# EAGLE board Bunza-DCC-Front-End-array (EAGLE 7.7.0)
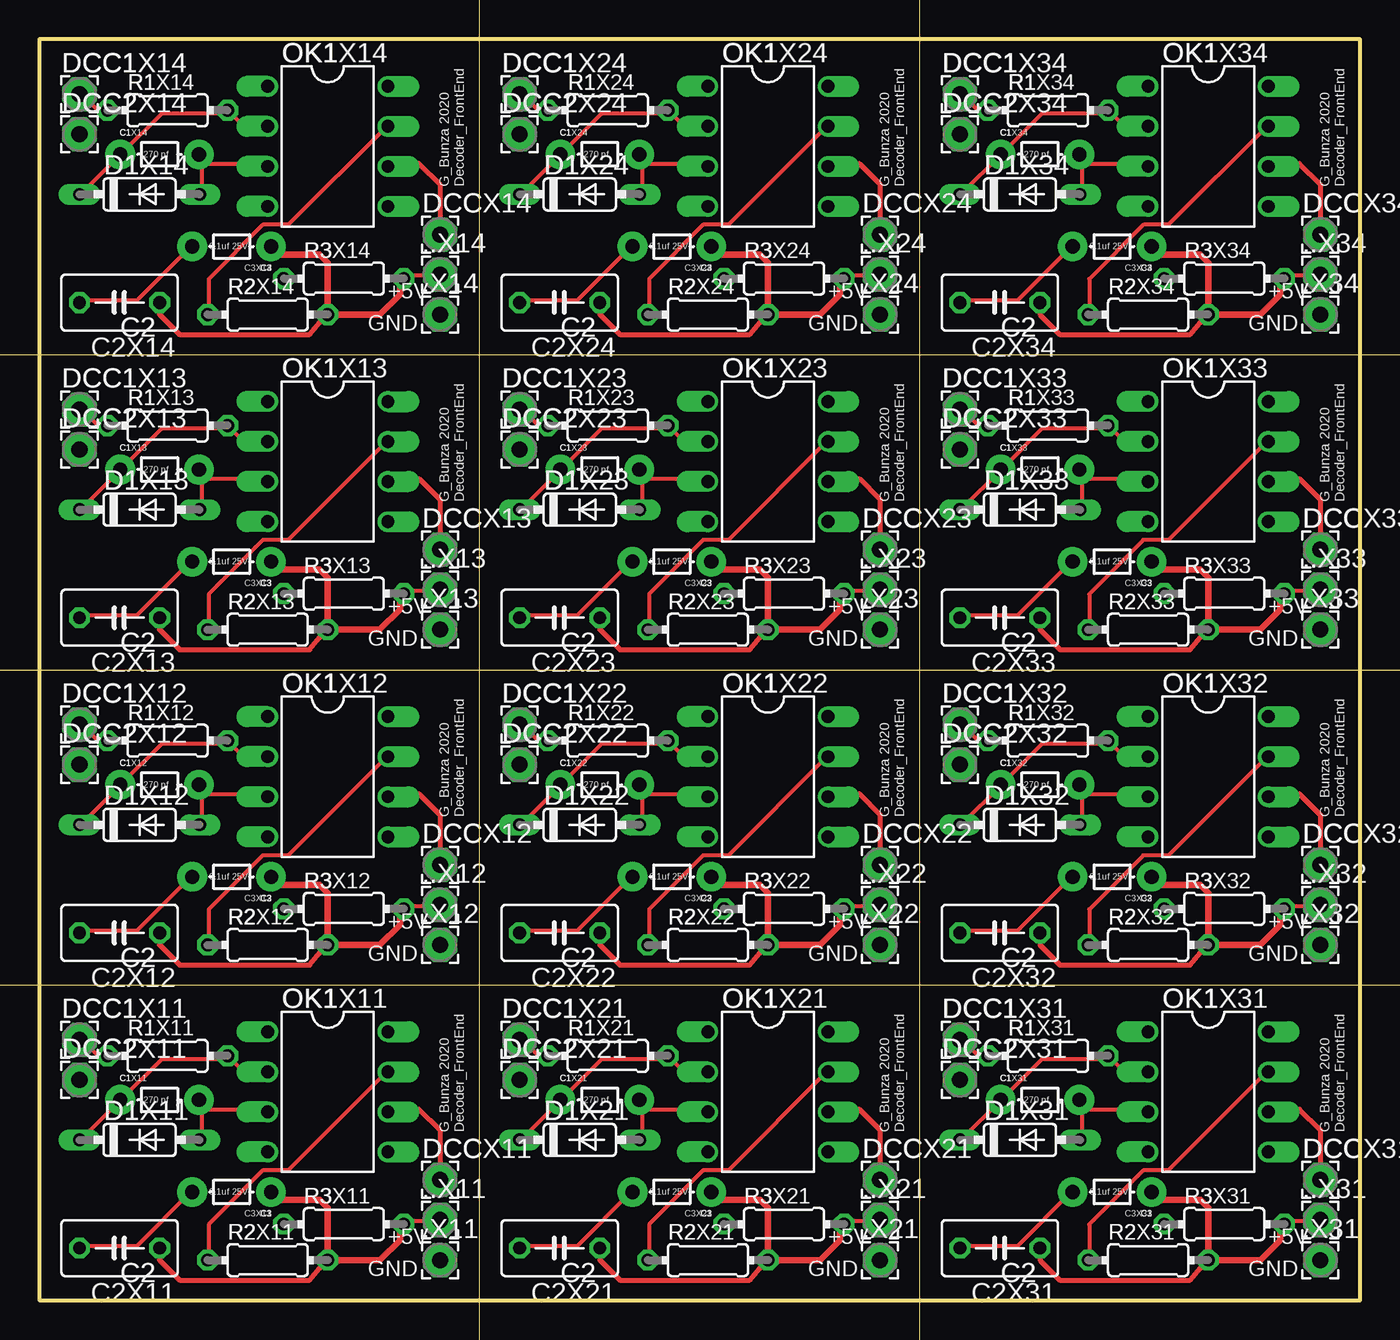
[diagram p0: board, top side]
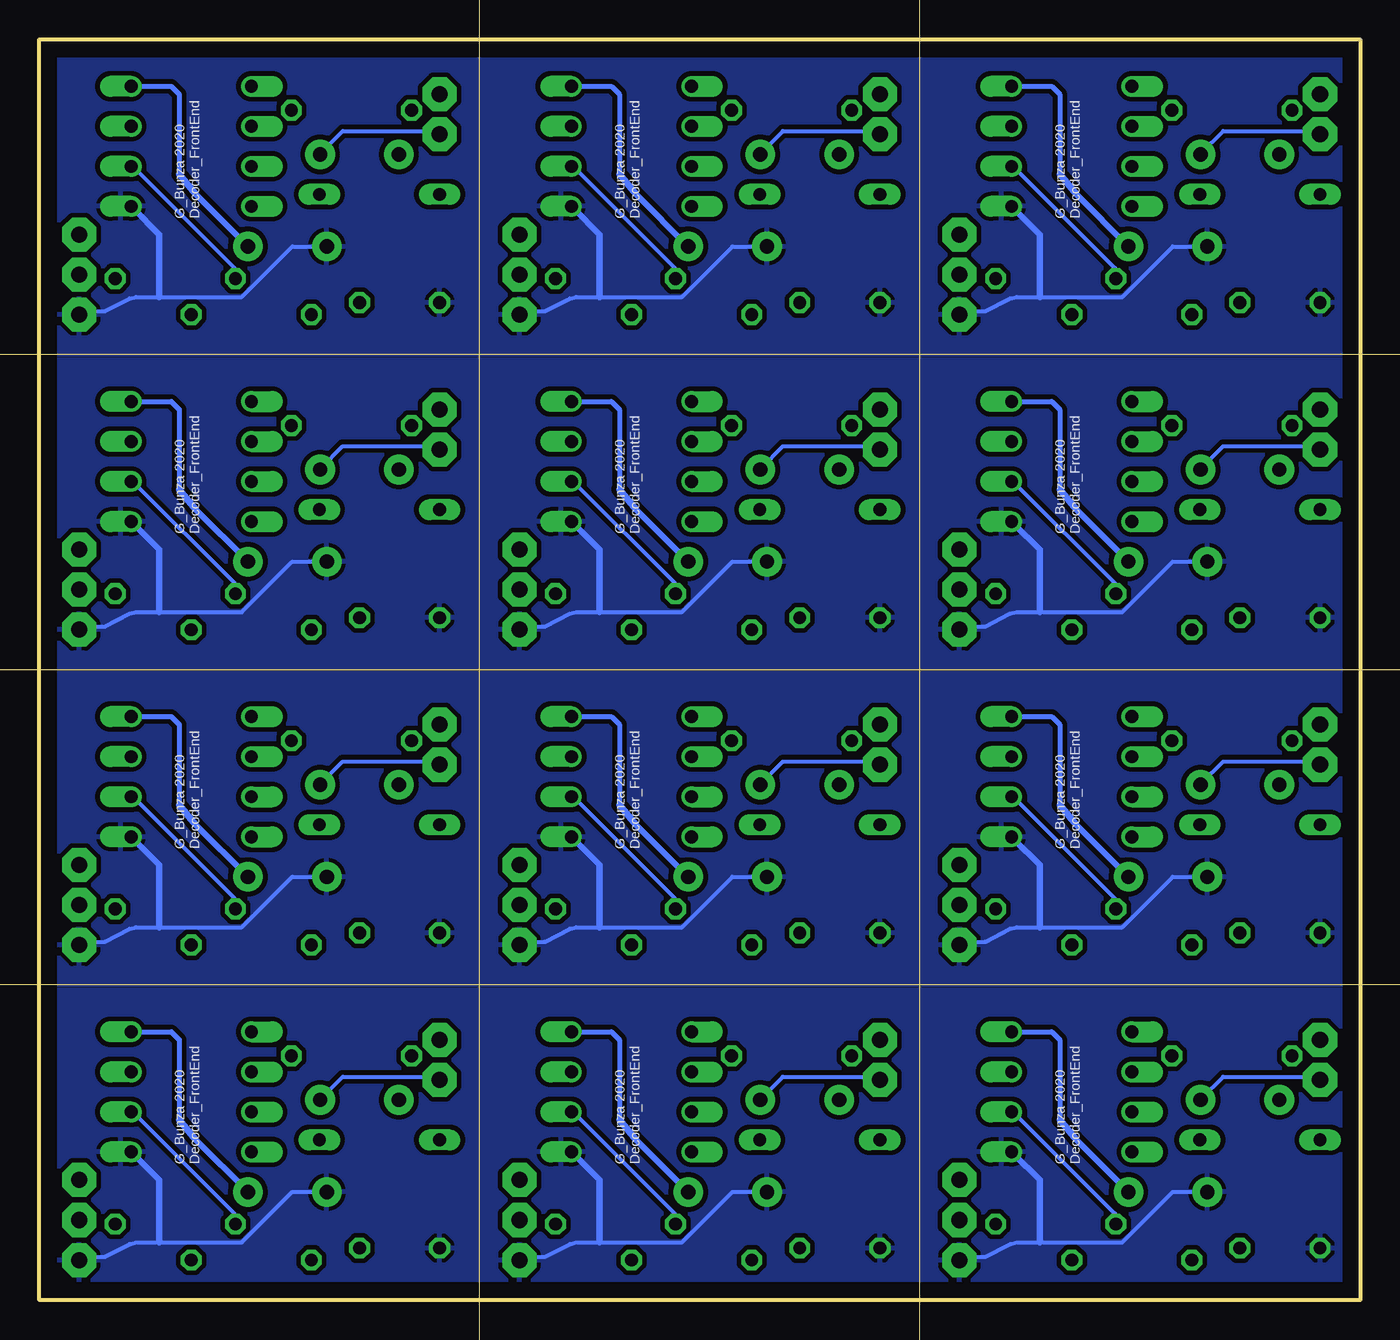
[diagram p1: board, bottom side, seen from below]

Size 83.76 x 79.96 mm. Coordinates in mm from the lower left corner, seen from the top.
Outline: 0,0 83.76,0 83.76,79.96 0,79.96 0,0
Copper layers (1*16): Top 0.035mm / dielectric 1.5mm / Bottom 0.035mm
Design rules "default": minimum track width 10mil, minimum drill 24mil, track to track 8mil, track to pad 8mil, pad to pad 8mil, via to via 8mil, smd to smd 8mil, copper to edge 40mil, drill to drill 8mil, minimum pad ring 10mil, minimum via ring 8mil, stop-mask expansion 4mil, vias tented up to drill 0mil, thermal gap 10mil
Milling: 5 lines

## Footprints (pad centres in the part's own frame; a part is rotated, then mirrored left to right if it is on the bottom)
2,15/1,0 = drill 1.016 pad 2.159 octagon: 1 0,0
AXIAL-5MM = drill 0.9 pad 1.88: P$1 -2.5,0; P$2 2.5,0
C050-035X075 = drill 0.813 octagon: 1 -2.54,0; 2 2.54,0
DO35-7 = drill 0.813 long: A 3.81,0; C -3.81,0
DIL08 = drill 0.813 offset: 1 -3.81,-3.81; 2 -1.27,-3.81; 3 1.27,-3.81; 4 3.81,-3.81; 5 3.81,3.81; 6 1.27,3.81; 7 -1.27,3.81; 8 -3.81,3.81
0204/7 = drill 0.813 octagon: 1 -3.81,0; 2 3.81,0

## Placement (x,y rotation side)
..X11  [2,15/1,0]  25.4,5.08 0 top
..X12  [2,15/1,0]  25.4,25.07 0 top
..X13  [2,15/1,0]  25.4,45.06 0 top
..X14  [2,15/1,0]  25.4,65.05 0 top
..X21  [2,15/1,0]  53.32,5.08 0 top
..X22  [2,15/1,0]  53.32,25.07 0 top
..X23  [2,15/1,0]  53.32,45.06 0 top
..X24  [2,15/1,0]  53.32,65.05 0 top
..X31  [2,15/1,0]  81.24,5.08 0 top
..X32  [2,15/1,0]  81.24,25.07 0 top
..X33  [2,15/1,0]  81.24,45.06 0 top
..X34  [2,15/1,0]  81.24,65.05 0 top
.X11  [2,15/1,0]  25.4,2.54 0 top
.X12  [2,15/1,0]  25.4,22.53 0 top
.X13  [2,15/1,0]  25.4,42.52 0 top
.X14  [2,15/1,0]  25.4,62.51 0 top
.X21  [2,15/1,0]  53.32,2.54 0 top
.X22  [2,15/1,0]  53.32,22.53 0 top
.X23  [2,15/1,0]  53.32,42.52 0 top
.X24  [2,15/1,0]  53.32,62.51 0 top
.X31  [2,15/1,0]  81.24,2.54 0 top
.X32  [2,15/1,0]  81.24,22.53 0 top
.X33  [2,15/1,0]  81.24,42.52 0 top
.X34  [2,15/1,0]  81.24,62.51 0 top
C1X11  270 pf  [AXIAL-5MM]  7.62,12.7 0 top
C1X12  270 pf  [AXIAL-5MM]  7.62,32.69 0 top
C1X13  270 pf  [AXIAL-5MM]  7.62,52.68 0 top
C1X14  270 pf  [AXIAL-5MM]  7.62,72.67 0 top
C1X21  270 pf  [AXIAL-5MM]  35.54,12.7 0 top
C1X22  270 pf  [AXIAL-5MM]  35.54,32.69 0 top
C1X23  270 pf  [AXIAL-5MM]  35.54,52.68 0 top
C1X24  270 pf  [AXIAL-5MM]  35.54,72.67 0 top
C1X31  270 pf  [AXIAL-5MM]  63.46,12.7 0 top
C1X32  270 pf  [AXIAL-5MM]  63.46,32.69 0 top
C1X33  270 pf  [AXIAL-5MM]  63.46,52.68 0 top
C1X34  270 pf  [AXIAL-5MM]  63.46,72.67 0 top
C2X11  22uf 25V  [C050-035X075]  5.08,3.3 180 top
C2X12  22uf 25V  [C050-035X075]  5.08,23.29 180 top
C2X13  22uf 25V  [C050-035X075]  5.08,43.28 180 top
C2X14  22uf 25V  [C050-035X075]  5.08,63.27 180 top
C2X21  22uf 25V  [C050-035X075]  33,3.3 180 top
C2X22  22uf 25V  [C050-035X075]  33,23.29 180 top
C2X23  22uf 25V  [C050-035X075]  33,43.28 180 top
C2X24  22uf 25V  [C050-035X075]  33,63.27 180 top
C2X31  22uf 25V  [C050-035X075]  60.92,3.3 180 top
C2X32  22uf 25V  [C050-035X075]  60.92,23.29 180 top
C2X33  22uf 25V  [C050-035X075]  60.92,43.28 180 top
C2X34  22uf 25V  [C050-035X075]  60.92,63.27 180 top
C3X11  0.1uf 25V  [AXIAL-5MM]  12.19,6.86 180 top
C3X12  0.1uf 25V  [AXIAL-5MM]  12.19,26.85 180 top
C3X13  0.1uf 25V  [AXIAL-5MM]  12.19,46.84 180 top
C3X14  0.1uf 25V  [AXIAL-5MM]  12.19,66.83 180 top
C3X21  0.1uf 25V  [AXIAL-5MM]  40.11,6.86 180 top
C3X22  0.1uf 25V  [AXIAL-5MM]  40.11,26.85 180 top
C3X23  0.1uf 25V  [AXIAL-5MM]  40.11,46.84 180 top
C3X24  0.1uf 25V  [AXIAL-5MM]  40.11,66.83 180 top
C3X31  0.1uf 25V  [AXIAL-5MM]  68.03,6.86 180 top
C3X32  0.1uf 25V  [AXIAL-5MM]  68.03,26.85 180 top
C3X33  0.1uf 25V  [AXIAL-5MM]  68.03,46.84 180 top
C3X34  0.1uf 25V  [AXIAL-5MM]  68.03,66.83 180 top
D1X11  1N4148  [DO35-7]  6.35,10.16 0 top
D1X12  1N4148  [DO35-7]  6.35,30.15 0 top
D1X13  1N4148  [DO35-7]  6.35,50.14 0 top
D1X14  1N4148  [DO35-7]  6.35,70.13 0 top
D1X21  1N4148  [DO35-7]  34.27,10.16 0 top
D1X22  1N4148  [DO35-7]  34.27,30.15 0 top
D1X23  1N4148  [DO35-7]  34.27,50.14 0 top
D1X24  1N4148  [DO35-7]  34.27,70.13 0 top
D1X31  1N4148  [DO35-7]  62.19,10.16 0 top
D1X32  1N4148  [DO35-7]  62.19,30.15 0 top
D1X33  1N4148  [DO35-7]  62.19,50.14 0 top
D1X34  1N4148  [DO35-7]  62.19,70.13 0 top
DCC1X11  [2,15/1,0]  2.54,16.51 0 top
DCC1X12  [2,15/1,0]  2.54,36.5 0 top
DCC1X13  [2,15/1,0]  2.54,56.49 0 top
DCC1X14  [2,15/1,0]  2.54,76.48 0 top
DCC1X21  [2,15/1,0]  30.46,16.51 0 top
DCC1X22  [2,15/1,0]  30.46,36.5 0 top
DCC1X23  [2,15/1,0]  30.46,56.49 0 top
DCC1X24  [2,15/1,0]  30.46,76.48 0 top
DCC1X31  [2,15/1,0]  58.38,16.51 0 top
DCC1X32  [2,15/1,0]  58.38,36.5 0 top
DCC1X33  [2,15/1,0]  58.38,56.49 0 top
DCC1X34  [2,15/1,0]  58.38,76.48 0 top
DCC2X11  [2,15/1,0]  2.54,13.97 0 top
DCC2X12  [2,15/1,0]  2.54,33.96 0 top
DCC2X13  [2,15/1,0]  2.54,53.95 0 top
DCC2X14  [2,15/1,0]  2.54,73.94 0 top
DCC2X21  [2,15/1,0]  30.46,13.97 0 top
DCC2X22  [2,15/1,0]  30.46,33.96 0 top
DCC2X23  [2,15/1,0]  30.46,53.95 0 top
DCC2X24  [2,15/1,0]  30.46,73.94 0 top
DCC2X31  [2,15/1,0]  58.38,13.97 0 top
DCC2X32  [2,15/1,0]  58.38,33.96 0 top
DCC2X33  [2,15/1,0]  58.38,53.95 0 top
DCC2X34  [2,15/1,0]  58.38,73.94 0 top
DCCX11  [2,15/1,0]  25.4,7.62 0 top
DCCX12  [2,15/1,0]  25.4,27.61 0 top
DCCX13  [2,15/1,0]  25.4,47.6 0 top
DCCX14  [2,15/1,0]  25.4,67.59 0 top
DCCX21  [2,15/1,0]  53.32,7.62 0 top
DCCX22  [2,15/1,0]  53.32,27.61 0 top
DCCX23  [2,15/1,0]  53.32,47.6 0 top
DCCX24  [2,15/1,0]  53.32,67.59 0 top
DCCX31  [2,15/1,0]  81.24,7.62 0 top
DCCX32  [2,15/1,0]  81.24,27.61 0 top
DCCX33  [2,15/1,0]  81.24,47.6 0 top
DCCX34  [2,15/1,0]  81.24,67.59 0 top
OK1X11  6N137  [DIL08]  18.29,13.21 270 top
OK1X12  6N137  [DIL08]  18.29,33.2 270 top
OK1X13  6N137  [DIL08]  18.29,53.19 270 top
OK1X14  6N137  [DIL08]  18.29,73.18 270 top
OK1X21  6N137  [DIL08]  46.21,13.21 270 top
OK1X22  6N137  [DIL08]  46.21,33.2 270 top
OK1X23  6N137  [DIL08]  46.21,53.19 270 top
OK1X24  6N137  [DIL08]  46.21,73.18 270 top
OK1X31  6N137  [DIL08]  74.13,13.21 270 top
OK1X32  6N137  [DIL08]  74.13,33.2 270 top
OK1X33  6N137  [DIL08]  74.13,53.19 270 top
OK1X34  6N137  [DIL08]  74.13,73.18 270 top
R1X11  1.3K  [0204/7]  8.13,15.49 0 top
R1X12  1.3K  [0204/7]  8.13,35.48 0 top
R1X13  1.3K  [0204/7]  8.13,55.47 0 top
R1X14  1.3K  [0204/7]  8.13,75.46 0 top
R1X21  1.3K  [0204/7]  36.05,15.49 0 top
R1X22  1.3K  [0204/7]  36.05,35.48 0 top
R1X23  1.3K  [0204/7]  36.05,55.47 0 top
R1X24  1.3K  [0204/7]  36.05,75.46 0 top
R1X31  1.3K  [0204/7]  63.97,15.49 0 top
R1X32  1.3K  [0204/7]  63.97,35.48 0 top
R1X33  1.3K  [0204/7]  63.97,55.47 0 top
R1X34  1.3K  [0204/7]  63.97,75.46 0 top
R2X11  10K  [0204/7]  14.48,2.54 0 top
R2X12  10K  [0204/7]  14.48,22.53 0 top
R2X13  10K  [0204/7]  14.48,42.52 0 top
R2X14  10K  [0204/7]  14.48,62.51 0 top
R2X21  10K  [0204/7]  42.4,2.54 0 top
R2X22  10K  [0204/7]  42.4,22.53 0 top
R2X23  10K  [0204/7]  42.4,42.52 0 top
R2X24  10K  [0204/7]  42.4,62.51 0 top
R2X31  10K  [0204/7]  70.32,2.54 0 top
R2X32  10K  [0204/7]  70.32,22.53 0 top
R2X33  10K  [0204/7]  70.32,42.52 0 top
R2X34  10K  [0204/7]  70.32,62.51 0 top
R3X11  5K  [0204/7]  19.3,4.83 0 top
R3X12  5K  [0204/7]  19.3,24.82 0 top
R3X13  5K  [0204/7]  19.3,44.81 0 top
R3X14  5K  [0204/7]  19.3,64.8 0 top
R3X21  5K  [0204/7]  47.22,4.83 0 top
R3X22  5K  [0204/7]  47.22,24.82 0 top
R3X23  5K  [0204/7]  47.22,44.81 0 top
R3X24  5K  [0204/7]  47.22,64.8 0 top
R3X31  5K  [0204/7]  75.14,4.83 0 top
R3X32  5K  [0204/7]  75.14,24.82 0 top
R3X33  5K  [0204/7]  75.14,44.81 0 top
R3X34  5K  [0204/7]  75.14,64.8 0 top

## Library data of the parts
..X11-..X14 ..X21-..X24 ..X31-..X34 .X11-.X14 .X21-.X24 .X31-.X34 DCC1X11-DCC1X14 DCC1X21-DCC1X24 DCC1X31-DCC1X34 DCC2X11-DCC2X14 DCC2X21-DCC2X24 DCC2X31-DCC2X34 DCCX11-DCCX14 DCCX21-DCCX24 DCCX31-DCCX34 = wirepad
C1X11-C1X14 C1X21-C1X24 C1X31-C1X34 C3X11-C3X14 C3X21-C3X24 C3X31-C3X34 = SparkFun-Capacitors
C2X11-C2X14 C2X21-C2X24 C2X31-C2X34 R1X11-R1X14 R1X21-R1X24 R1X31-R1X34 R2X11-R2X14 R2X21-R2X24 R2X31-R2X34 R3X11-R3X14 R3X21-R3X24 R3X31-R3X34 = rcl
D1X11-D1X14 D1X21-D1X24 D1X31-D1X34 = diode
OK1X11-OK1X14 OK1X21-OK1X24 OK1X31-OK1X34 = optocoupler

## Nets
GNDX11: .X11.1 C2X11.2 C3X11.P$2 OK1X11.5
GNDX12: .X12.1 C2X12.2 C3X12.P$2 OK1X12.5
GNDX13: .X13.1 C2X13.2 C3X13.P$2 OK1X13.5
GNDX14: .X14.1 C2X14.2 C3X14.P$2 OK1X14.5
GNDX21: .X21.1 C2X21.2 C3X21.P$2 OK1X21.5
GNDX22: .X22.1 C2X22.2 C3X22.P$2 OK1X22.5
GNDX23: .X23.1 C2X23.2 C3X23.P$2 OK1X23.5
GNDX24: .X24.1 C2X24.2 C3X24.P$2 OK1X24.5
GNDX31: .X31.1 C2X31.2 C3X31.P$2 OK1X31.5
GNDX32: .X32.1 C2X32.2 C3X32.P$2 OK1X32.5
GNDX33: .X33.1 C2X33.2 C3X33.P$2 OK1X33.5
GNDX34: .X34.1 C2X34.2 C3X34.P$2 OK1X34.5
N$1X11: DCC1X11.1 R1X11.1
N$1X12: DCC1X12.1 R1X12.1
N$1X13: DCC1X13.1 R1X13.1
N$1X14: DCC1X14.1 R1X14.1
N$1X21: DCC1X21.1 R1X21.1
N$1X22: DCC1X22.1 R1X22.1
N$1X23: DCC1X23.1 R1X23.1
N$1X24: DCC1X24.1 R1X24.1
N$1X31: DCC1X31.1 R1X31.1
N$1X32: DCC1X32.1 R1X32.1
N$1X33: DCC1X33.1 R1X33.1
N$1X34: DCC1X34.1 R1X34.1
N$2X11: DCCX11.1 OK1X11.6 R3X11.1
N$2X12: DCCX12.1 OK1X12.6 R3X12.1
N$2X13: DCCX13.1 OK1X13.6 R3X13.1
N$2X14: DCCX14.1 OK1X14.6 R3X14.1
N$2X21: DCCX21.1 OK1X21.6 R3X21.1
N$2X22: DCCX22.1 OK1X22.6 R3X22.1
N$2X23: DCCX23.1 OK1X23.6 R3X23.1
N$2X24: DCCX24.1 OK1X24.6 R3X24.1
N$2X31: DCCX31.1 OK1X31.6 R3X31.1
N$2X32: DCCX32.1 OK1X32.6 R3X32.1
N$2X33: DCCX33.1 OK1X33.6 R3X33.1
N$2X34: DCCX34.1 OK1X34.6 R3X34.1
N$13X11: OK1X11.7 R2X11.1
N$13X12: OK1X12.7 R2X12.1
N$13X13: OK1X13.7 R2X13.1
N$13X14: OK1X14.7 R2X14.1
N$13X21: OK1X21.7 R2X21.1
N$13X22: OK1X22.7 R2X22.1
N$13X23: OK1X23.7 R2X23.1
N$13X24: OK1X24.7 R2X24.1
N$13X31: OK1X31.7 R2X31.1
N$13X32: OK1X32.7 R2X32.1
N$13X33: OK1X33.7 R2X33.1
N$13X34: OK1X34.7 R2X34.1
N$33X11: ..X11.1 C2X11.1 C3X11.P$1 OK1X11.8 R2X11.2 R3X11.2
N$33X12: ..X12.1 C2X12.1 C3X12.P$1 OK1X12.8 R2X12.2 R3X12.2
N$33X13: ..X13.1 C2X13.1 C3X13.P$1 OK1X13.8 R2X13.2 R3X13.2
N$33X14: ..X14.1 C2X14.1 C3X14.P$1 OK1X14.8 R2X14.2 R3X14.2
N$33X21: ..X21.1 C2X21.1 C3X21.P$1 OK1X21.8 R2X21.2 R3X21.2
N$33X22: ..X22.1 C2X22.1 C3X22.P$1 OK1X22.8 R2X22.2 R3X22.2
N$33X23: ..X23.1 C2X23.1 C3X23.P$1 OK1X23.8 R2X23.2 R3X23.2
N$33X24: ..X24.1 C2X24.1 C3X24.P$1 OK1X24.8 R2X24.2 R3X24.2
N$33X31: ..X31.1 C2X31.1 C3X31.P$1 OK1X31.8 R2X31.2 R3X31.2
N$33X32: ..X32.1 C2X32.1 C3X32.P$1 OK1X32.8 R2X32.2 R3X32.2
N$33X33: ..X33.1 C2X33.1 C3X33.P$1 OK1X33.8 R2X33.2 R3X33.2
N$33X34: ..X34.1 C2X34.1 C3X34.P$1 OK1X34.8 R2X34.2 R3X34.2
N$35X11: C1X11.P$1 D1X11.C OK1X11.2 R1X11.2
N$35X12: C1X12.P$1 D1X12.C OK1X12.2 R1X12.2
N$35X13: C1X13.P$1 D1X13.C OK1X13.2 R1X13.2
N$35X14: C1X14.P$1 D1X14.C OK1X14.2 R1X14.2
N$35X21: C1X21.P$1 D1X21.C OK1X21.2 R1X21.2
N$35X22: C1X22.P$1 D1X22.C OK1X22.2 R1X22.2
N$35X23: C1X23.P$1 D1X23.C OK1X23.2 R1X23.2
N$35X24: C1X24.P$1 D1X24.C OK1X24.2 R1X24.2
N$35X31: C1X31.P$1 D1X31.C OK1X31.2 R1X31.2
N$35X32: C1X32.P$1 D1X32.C OK1X32.2 R1X32.2
N$35X33: C1X33.P$1 D1X33.C OK1X33.2 R1X33.2
N$35X34: C1X34.P$1 D1X34.C OK1X34.2 R1X34.2
N$39X11: C1X11.P$2 D1X11.A DCC2X11.1 OK1X11.3
N$39X12: C1X12.P$2 D1X12.A DCC2X12.1 OK1X12.3
N$39X13: C1X13.P$2 D1X13.A DCC2X13.1 OK1X13.3
N$39X14: C1X14.P$2 D1X14.A DCC2X14.1 OK1X14.3
N$39X21: C1X21.P$2 D1X21.A DCC2X21.1 OK1X21.3
N$39X22: C1X22.P$2 D1X22.A DCC2X22.1 OK1X22.3
N$39X23: C1X23.P$2 D1X23.A DCC2X23.1 OK1X23.3
N$39X24: C1X24.P$2 D1X24.A DCC2X24.1 OK1X24.3
N$39X31: C1X31.P$2 D1X31.A DCC2X31.1 OK1X31.3
N$39X32: C1X32.P$2 D1X32.A DCC2X32.1 OK1X32.3
N$39X33: C1X33.P$2 D1X33.A DCC2X33.1 OK1X33.3
N$39X34: C1X34.P$2 D1X34.A DCC2X34.1 OK1X34.3

## Tracks (layer width: path | path; a pad name or v marks a point on that pad's centre or on a via)
GNDX11
  Top 0.254: C2X11.2 2.74,3.43 6.17,3.43 9.6,6.86 C3X11.P$2
  Bottom 0.254: 21.95,9.37 OK1X11.5 | .X11.1 25.38,2.74 23.77,2.74 22.2,3.56 21.79,3.66 20.32,3.66 15.09,3.66 11.89,6.86 C3X11.P$2
  Bottom 0.406: 21.95,9.37 21.95,9.25 20.32,7.62 20.32,3.66
  pour Bottom (isolate 0.305): 0,0 27.94,0 27.94,19.68 0,19.68
GNDX12
  Top 0.254: C2X12.2 2.74,23.42 6.17,23.42 9.6,26.85 C3X12.P$2
  Bottom 0.254: 21.95,29.36 OK1X12.5 | .X12.1 25.38,22.73 23.77,22.73 22.2,23.55 21.79,23.65 20.32,23.65 15.09,23.65 11.89,26.85 C3X12.P$2
  Bottom 0.406: 21.95,29.36 21.95,29.24 20.32,27.61 20.32,23.65
  pour Bottom (isolate 0.305): 0,19.99 27.94,19.99 27.94,39.67 0,39.67
GNDX13
  Top 0.254: C2X13.2 2.74,43.41 6.17,43.41 9.6,46.84 C3X13.P$2
  Bottom 0.254: 21.95,49.35 OK1X13.5 | .X13.1 25.38,42.72 23.77,42.72 22.2,43.54 21.79,43.64 20.32,43.64 15.09,43.64 11.89,46.84 C3X13.P$2
  Bottom 0.406: 21.95,49.35 21.95,49.23 20.32,47.6 20.32,43.64
  pour Bottom (isolate 0.305): 0,39.98 27.94,39.98 27.94,59.66 0,59.66
GNDX14
  Top 0.254: C2X14.2 2.74,63.4 6.17,63.4 9.6,66.83 C3X14.P$2
  Bottom 0.254: 21.95,69.34 OK1X14.5 | .X14.1 25.38,62.71 23.77,62.71 22.2,63.53 21.79,63.63 20.32,63.63 15.09,63.63 11.89,66.83 C3X14.P$2
  Bottom 0.406: 21.95,69.34 21.95,69.22 20.32,67.59 20.32,63.63
  pour Bottom (isolate 0.305): 0,59.97 27.94,59.97 27.94,79.66 0,79.66
GNDX21
  Top 0.254: C2X21.2 30.66,3.43 34.09,3.43 37.52,6.86 C3X21.P$2
  Bottom 0.254: 49.87,9.37 OK1X21.5 | .X21.1 53.3,2.74 51.69,2.74 50.12,3.56 49.71,3.66 48.24,3.66 43.01,3.66 39.81,6.86 C3X21.P$2
  Bottom 0.406: 49.87,9.37 49.87,9.25 48.24,7.62 48.24,3.66
  pour Bottom (isolate 0.305): 27.92,0 55.86,0 55.86,19.68 27.92,19.68
GNDX22
  Top 0.254: C2X22.2 30.66,23.42 34.09,23.42 37.52,26.85 C3X22.P$2
  Bottom 0.254: 49.87,29.36 OK1X22.5 | .X22.1 53.3,22.73 51.69,22.73 50.12,23.55 49.71,23.65 48.24,23.65 43.01,23.65 39.81,26.85 C3X22.P$2
  Bottom 0.406: 49.87,29.36 49.87,29.24 48.24,27.61 48.24,23.65
  pour Bottom (isolate 0.305): 27.92,19.99 55.86,19.99 55.86,39.67 27.92,39.67
GNDX23
  Top 0.254: C2X23.2 30.66,43.41 34.09,43.41 37.52,46.84 C3X23.P$2
  Bottom 0.254: 49.87,49.35 OK1X23.5 | .X23.1 53.3,42.72 51.69,42.72 50.12,43.54 49.71,43.64 48.24,43.64 43.01,43.64 39.81,46.84 C3X23.P$2
  Bottom 0.406: 49.87,49.35 49.87,49.23 48.24,47.6 48.24,43.64
  pour Bottom (isolate 0.305): 27.92,39.98 55.86,39.98 55.86,59.66 27.92,59.66
GNDX24
  Top 0.254: C2X24.2 30.66,63.4 34.09,63.4 37.52,66.83 C3X24.P$2
  Bottom 0.254: 49.87,69.34 OK1X24.5 | .X24.1 53.3,62.71 51.69,62.71 50.12,63.53 49.71,63.63 48.24,63.63 43.01,63.63 39.81,66.83 C3X24.P$2
  Bottom 0.406: 49.87,69.34 49.87,69.22 48.24,67.59 48.24,63.63
  pour Bottom (isolate 0.305): 27.92,59.97 55.86,59.97 55.86,79.66 27.92,79.66
GNDX31
  Top 0.254: C2X31.2 58.58,3.43 62.01,3.43 65.44,6.86 C3X31.P$2
  Bottom 0.254: 77.79,9.37 OK1X31.5 | .X31.1 81.22,2.74 79.61,2.74 78.04,3.56 77.63,3.66 76.16,3.66 70.93,3.66 67.73,6.86 C3X31.P$2
  Bottom 0.406: 77.79,9.37 77.79,9.25 76.16,7.62 76.16,3.66
  pour Bottom (isolate 0.305): 55.84,0 83.78,0 83.78,19.68 55.84,19.68
GNDX32
  Top 0.254: C2X32.2 58.58,23.42 62.01,23.42 65.44,26.85 C3X32.P$2
  Bottom 0.254: 77.79,29.36 OK1X32.5 | .X32.1 81.22,22.73 79.61,22.73 78.04,23.55 77.63,23.65 76.16,23.65 70.93,23.65 67.73,26.85 C3X32.P$2
  Bottom 0.406: 77.79,29.36 77.79,29.24 76.16,27.61 76.16,23.65
  pour Bottom (isolate 0.305): 55.84,19.99 83.78,19.99 83.78,39.67 55.84,39.67
GNDX33
  Top 0.254: C2X33.2 58.58,43.41 62.01,43.41 65.44,46.84 C3X33.P$2
  Bottom 0.254: 77.79,49.35 OK1X33.5 | .X33.1 81.22,42.72 79.61,42.72 78.04,43.54 77.63,43.64 76.16,43.64 70.93,43.64 67.73,46.84 C3X33.P$2
  Bottom 0.406: 77.79,49.35 77.79,49.23 76.16,47.6 76.16,43.64
  pour Bottom (isolate 0.305): 55.84,39.98 83.78,39.98 83.78,59.66 55.84,59.66
GNDX34
  Top 0.254: C2X34.2 58.58,63.4 62.01,63.4 65.44,66.83 C3X34.P$2
  Bottom 0.254: 77.79,69.34 OK1X34.5 | .X34.1 81.22,62.71 79.61,62.71 78.04,63.53 77.63,63.63 76.16,63.63 70.93,63.63 67.73,66.83 C3X34.P$2
  Bottom 0.406: 77.79,69.34 77.79,69.22 76.16,67.59 76.16,63.63
  pour Bottom (isolate 0.305): 55.84,59.97 83.78,59.97 83.78,79.66 55.84,79.66
N$1X11
  Top 0.254: R1X11.1 4.12,15.54 3.66,15.54 2.74,16.46 DCC1X11.1
N$1X12
  Top 0.254: R1X12.1 4.12,35.53 3.66,35.53 2.74,36.45 DCC1X12.1
N$1X13
  Top 0.254: R1X13.1 4.12,55.52 3.66,55.52 2.74,56.44 DCC1X13.1
N$1X14
  Top 0.254: R1X14.1 4.12,75.52 3.66,75.52 2.74,76.43 DCC1X14.1
N$1X21
  Top 0.254: R1X21.1 32.03,15.54 31.58,15.54 30.66,16.46 DCC1X21.1
N$1X22
  Top 0.254: R1X22.1 32.03,35.53 31.58,35.53 30.66,36.45 DCC1X22.1
N$1X23
  Top 0.254: R1X23.1 32.03,55.52 31.58,55.52 30.66,56.44 DCC1X23.1
N$1X24
  Top 0.254: R1X24.1 32.03,75.52 31.58,75.52 30.66,76.43 DCC1X24.1
N$1X31
  Top 0.254: R1X31.1 59.95,15.54 59.5,15.54 58.58,16.46 DCC1X31.1
N$1X32
  Top 0.254: R1X32.1 59.95,35.53 59.5,35.53 58.58,36.45 DCC1X32.1
N$1X33
  Top 0.254: R1X33.1 59.95,55.52 59.5,55.52 58.58,56.44 DCC1X33.1
N$1X34
  Top 0.254: R1X34.1 59.95,75.52 59.5,75.52 58.58,76.43 DCC1X34.1
N$2X11
  Top 0.254: 25.38,8.26 25.38,7.77 DCCX11.1 | 22.17,12.12 OK1X11.6
  Top 0.305: 22.17,12.12 24.08,12.12 25.4,10.79 DCCX11.1 | 25.4,8.28 25.38,8.26
  Bottom 0.254: R3X11.1 15.54,5.03 15.54,5.49 21.95,11.89 OK1X11.6
N$2X12
  Top 0.254: 25.38,28.25 25.38,27.76 DCCX12.1 | 22.17,32.11 OK1X12.6
  Top 0.305: 22.17,32.11 24.08,32.11 25.4,30.79 DCCX12.1 | 25.4,28.27 25.38,28.25
  Bottom 0.254: R3X12.1 15.54,25.02 15.54,25.48 21.95,31.88 OK1X12.6
N$2X13
  Top 0.254: 25.38,48.23 25.38,47.75 DCCX13.1 | 22.17,52.1 OK1X13.6
  Top 0.305: 22.17,52.1 24.08,52.1 25.4,50.77 DCCX13.1 | 25.4,48.26 25.38,48.23
  Bottom 0.254: R3X13.1 15.54,45.01 15.54,45.47 21.95,51.87 OK1X13.6
N$2X14
  Top 0.254: 25.38,68.22 25.38,67.74 DCCX14.1 | 22.17,72.09 OK1X14.6
  Top 0.305: 22.17,72.09 24.08,72.09 25.4,70.77 DCCX14.1 | 25.4,68.25 25.38,68.22
  Bottom 0.254: R3X14.1 15.54,65 15.54,65.46 21.95,71.86 OK1X14.6
N$2X21
  Top 0.254: 53.3,8.26 53.3,7.77 DCCX21.1 | 50.09,12.12 OK1X21.6
  Top 0.305: 50.09,12.12 52,12.12 53.32,10.79 DCCX21.1 | 53.32,8.28 53.3,8.26
  Bottom 0.254: R3X21.1 43.47,5.03 43.47,5.49 49.87,11.89 OK1X21.6
N$2X22
  Top 0.254: 53.3,28.25 53.3,27.76 DCCX22.1 | 50.09,32.11 OK1X22.6
  Top 0.305: 50.09,32.11 52,32.11 53.32,30.79 DCCX22.1 | 53.32,28.27 53.3,28.25
  Bottom 0.254: R3X22.1 43.47,25.02 43.47,25.48 49.87,31.88 OK1X22.6
N$2X23
  Top 0.254: 53.3,48.23 53.3,47.75 DCCX23.1 | 50.09,52.1 OK1X23.6
  Top 0.305: 50.09,52.1 52,52.1 53.32,50.77 DCCX23.1 | 53.32,48.26 53.3,48.23
  Bottom 0.254: R3X23.1 43.47,45.01 43.47,45.47 49.87,51.87 OK1X23.6
N$2X24
  Top 0.254: 53.3,68.22 53.3,67.74 DCCX24.1 | 50.09,72.09 OK1X24.6
  Top 0.305: 50.09,72.09 52,72.09 53.32,70.77 DCCX24.1 | 53.32,68.25 53.3,68.22
  Bottom 0.254: R3X24.1 43.47,65 43.47,65.46 49.87,71.86 OK1X24.6
N$2X31
  Top 0.254: 81.22,8.26 81.22,7.77 DCCX31.1 | 78.01,12.12 OK1X31.6
  Top 0.305: 78.01,12.12 79.92,12.12 81.24,10.79 DCCX31.1 | 81.24,8.28 81.22,8.26
  Bottom 0.254: R3X31.1 71.39,5.03 71.39,5.49 77.79,11.89 OK1X31.6
N$2X32
  Top 0.254: 81.22,28.25 81.22,27.76 DCCX32.1 | 78.01,32.11 OK1X32.6
  Top 0.305: 78.01,32.11 79.92,32.11 81.24,30.79 DCCX32.1 | 81.24,28.27 81.22,28.25
  Bottom 0.254: R3X32.1 71.39,25.02 71.39,25.48 77.79,31.88 OK1X32.6
N$2X33
  Top 0.254: 81.22,48.23 81.22,47.75 DCCX33.1 | 78.01,52.1 OK1X33.6
  Top 0.305: 78.01,52.1 79.92,52.1 81.24,50.77 DCCX33.1 | 81.24,48.26 81.22,48.23
  Bottom 0.254: R3X33.1 71.39,45.01 71.39,45.47 77.79,51.87 OK1X33.6
N$2X34
  Top 0.254: 81.22,68.22 81.22,67.74 DCCX34.1 | 78.01,72.09 OK1X34.6
  Top 0.305: 78.01,72.09 79.92,72.09 81.24,70.77 DCCX34.1 | 81.24,68.25 81.22,68.22
  Bottom 0.254: R3X34.1 71.39,65 71.39,65.46 77.79,71.86 OK1X34.6
N$13X11
  Top 0.254: R2X11.1 10.74,2.74 10.74,4.8 14.17,8.23 15.77,8.23 21.95,14.4 OK1X11.7
N$13X12
  Top 0.254: R2X12.1 10.74,22.73 10.74,24.79 14.17,28.22 15.77,28.22 21.95,34.39 OK1X12.7
N$13X13
  Top 0.254: R2X13.1 10.74,42.72 10.74,44.78 14.17,48.21 15.77,48.21 21.95,54.38 OK1X13.7
N$13X14
  Top 0.254: R2X14.1 10.74,62.71 10.74,64.77 14.17,68.2 15.77,68.2 21.95,74.37 OK1X14.7
N$13X21
  Top 0.254: R2X21.1 38.66,2.74 38.66,4.8 42.09,8.23 43.69,8.23 49.87,14.4 OK1X21.7
N$13X22
  Top 0.254: R2X22.1 38.66,22.73 38.66,24.79 42.09,28.22 43.69,28.22 49.87,34.39 OK1X22.7
N$13X23
  Top 0.254: R2X23.1 38.66,42.72 38.66,44.78 42.09,48.21 43.69,48.21 49.87,54.38 OK1X23.7
N$13X24
  Top 0.254: R2X24.1 38.66,62.71 38.66,64.77 42.09,68.2 43.69,68.2 49.87,74.37 OK1X24.7
N$13X31
  Top 0.254: R2X31.1 66.58,2.74 66.58,4.8 70.01,8.23 71.61,8.23 77.79,14.4 OK1X31.7
N$13X32
  Top 0.254: R2X32.1 66.58,22.73 66.58,24.79 70.01,28.22 71.61,28.22 77.79,34.39 OK1X32.7
N$13X33
  Top 0.254: R2X33.1 66.58,42.72 66.58,44.78 70.01,48.21 71.61,48.21 77.79,54.38 OK1X33.7
N$13X34
  Top 0.254: R2X34.1 66.58,62.71 66.58,64.77 70.01,68.2 71.61,68.2 77.79,74.37 OK1X34.7
N$33X11
  Top 0.254: ..X11.1 25.38,5.03 23.32,5.03 R3X11.2 | 14.86,6.86 14.73,6.86
  Top 0.305: C2X11.1 7.62,2.54 8.89,1.27 17.14,1.27 17.78,2.03 R2X11.2
  Top 0.406: R3X11.2 22.86,4.57 22.86,3.81 21.59,2.54 R2X11.2 18.29,5.84 17.78,6.35 15.24,6.35 14.73,6.86 C3X11.P$1
  Bottom 0.305: OK1X11.8 19.56,17.02 19.05,16.51 19.05,11.43
  Bottom 0.406: 19.05,11.43 17.99,10.16 C3X11.P$1
N$33X12
  Top 0.254: ..X12.1 25.38,25.02 23.32,25.02 R3X12.2 | 14.86,26.85 14.73,26.85
  Top 0.305: C2X12.1 7.62,22.53 8.89,21.26 17.14,21.26 17.78,22.02 R2X12.2
  Top 0.406: R3X12.2 22.86,24.56 22.86,23.8 21.59,22.53 R2X12.2 18.29,25.83 17.78,26.34 15.24,26.34 14.73,26.85 C3X12.P$1
  Bottom 0.305: OK1X12.8 19.56,37.01 19.05,36.5 19.05,31.42
  Bottom 0.406: 19.05,31.42 17.99,30.15 C3X12.P$1
N$33X13
  Top 0.254: ..X13.1 25.38,45.01 23.32,45.01 R3X13.2 | 14.86,46.84 14.73,46.84
  Top 0.305: C2X13.1 7.62,42.52 8.89,41.25 17.14,41.25 17.78,42.01 R2X13.2
  Top 0.406: R3X13.2 22.86,44.55 22.86,43.79 21.59,42.52 R2X13.2 18.29,45.82 17.78,46.33 15.24,46.33 14.73,46.84 C3X13.P$1
  Bottom 0.305: OK1X13.8 19.56,57 19.05,56.49 19.05,51.41
  Bottom 0.406: 19.05,51.41 17.99,50.14 C3X13.P$1
N$33X14
  Top 0.254: ..X14.1 25.38,65 23.32,65 R3X14.2 | 14.86,66.83 14.73,66.83
  Top 0.305: C2X14.1 7.62,62.51 8.89,61.24 17.14,61.24 17.78,62 R2X14.2
  Top 0.406: R3X14.2 22.86,64.54 22.86,63.78 21.59,62.51 R2X14.2 18.29,65.81 17.78,66.32 15.24,66.32 14.73,66.83 C3X14.P$1
  Bottom 0.305: OK1X14.8 19.56,76.99 19.05,76.48 19.05,71.4
  Bottom 0.406: 19.05,71.4 17.99,70.13 C3X14.P$1
N$33X21
  Top 0.254: ..X21.1 53.3,5.03 51.24,5.03 R3X21.2 | 42.78,6.86 42.65,6.86
  Top 0.305: C2X21.1 35.54,2.54 36.81,1.27 45.06,1.27 45.7,2.03 R2X21.2
  Top 0.406: R3X21.2 50.78,4.57 50.78,3.81 49.51,2.54 R2X21.2 46.21,5.84 45.7,6.35 43.16,6.35 42.65,6.86 C3X21.P$1
  Bottom 0.305: OK1X21.8 47.48,17.02 46.97,16.51 46.97,11.43
  Bottom 0.406: 46.97,11.43 45.91,10.16 C3X21.P$1
N$33X22
  Top 0.254: ..X22.1 53.3,25.02 51.24,25.02 R3X22.2 | 42.78,26.85 42.65,26.85
  Top 0.305: C2X22.1 35.54,22.53 36.81,21.26 45.06,21.26 45.7,22.02 R2X22.2
  Top 0.406: R3X22.2 50.78,24.56 50.78,23.8 49.51,22.53 R2X22.2 46.21,25.83 45.7,26.34 43.16,26.34 42.65,26.85 C3X22.P$1
  Bottom 0.305: OK1X22.8 47.48,37.01 46.97,36.5 46.97,31.42
  Bottom 0.406: 46.97,31.42 45.91,30.15 C3X22.P$1
N$33X23
  Top 0.254: ..X23.1 53.3,45.01 51.24,45.01 R3X23.2 | 42.78,46.84 42.65,46.84
  Top 0.305: C2X23.1 35.54,42.52 36.81,41.25 45.06,41.25 45.7,42.01 R2X23.2
  Top 0.406: R3X23.2 50.78,44.55 50.78,43.79 49.51,42.52 R2X23.2 46.21,45.82 45.7,46.33 43.16,46.33 42.65,46.84 C3X23.P$1
  Bottom 0.305: OK1X23.8 47.48,57 46.97,56.49 46.97,51.41
  Bottom 0.406: 46.97,51.41 45.91,50.14 C3X23.P$1
N$33X24
  Top 0.254: ..X24.1 53.3,65 51.24,65 R3X24.2 | 42.78,66.83 42.65,66.83
  Top 0.305: C2X24.1 35.54,62.51 36.81,61.24 45.06,61.24 45.7,62 R2X24.2
  Top 0.406: R3X24.2 50.78,64.54 50.78,63.78 49.51,62.51 R2X24.2 46.21,65.81 45.7,66.32 43.16,66.32 42.65,66.83 C3X24.P$1
  Bottom 0.305: OK1X24.8 47.48,76.99 46.97,76.48 46.97,71.4
  Bottom 0.406: 46.97,71.4 45.91,70.13 C3X24.P$1
N$33X31
  Top 0.254: ..X31.1 81.22,5.03 79.16,5.03 R3X31.2 | 70.7,6.86 70.57,6.86
  Top 0.305: C2X31.1 63.46,2.54 64.73,1.27 72.98,1.27 73.62,2.03 R2X31.2
  Top 0.406: R3X31.2 78.7,4.57 78.7,3.81 77.43,2.54 R2X31.2 74.13,5.84 73.62,6.35 71.08,6.35 70.57,6.86 C3X31.P$1
  Bottom 0.305: OK1X31.8 75.4,17.02 74.89,16.51 74.89,11.43
  Bottom 0.406: 74.89,11.43 73.83,10.16 C3X31.P$1
N$33X32
  Top 0.254: ..X32.1 81.22,25.02 79.16,25.02 R3X32.2 | 70.7,26.85 70.57,26.85
  Top 0.305: C2X32.1 63.46,22.53 64.73,21.26 72.98,21.26 73.62,22.02 R2X32.2
  Top 0.406: R3X32.2 78.7,24.56 78.7,23.8 77.43,22.53 R2X32.2 74.13,25.83 73.62,26.34 71.08,26.34 70.57,26.85 C3X32.P$1
  Bottom 0.305: OK1X32.8 75.4,37.01 74.89,36.5 74.89,31.42
  Bottom 0.406: 74.89,31.42 73.83,30.15 C3X32.P$1
N$33X33
  Top 0.254: ..X33.1 81.22,45.01 79.16,45.01 R3X33.2 | 70.7,46.84 70.57,46.84
  Top 0.305: C2X33.1 63.46,42.52 64.73,41.25 72.98,41.25 73.62,42.01 R2X33.2
  Top 0.406: R3X33.2 78.7,44.55 78.7,43.79 77.43,42.52 R2X33.2 74.13,45.82 73.62,46.33 71.08,46.33 70.57,46.84 C3X33.P$1
  Bottom 0.305: OK1X33.8 75.4,57 74.89,56.49 74.89,51.41
  Bottom 0.406: 74.89,51.41 73.83,50.14 C3X33.P$1
N$33X34
  Top 0.254: ..X34.1 81.22,65 79.16,65 R3X34.2 | 70.7,66.83 70.57,66.83
  Top 0.305: C2X34.1 63.46,62.51 64.73,61.24 72.98,61.24 73.62,62 R2X34.2
  Top 0.406: R3X34.2 78.7,64.54 78.7,63.78 77.43,62.51 R2X34.2 74.13,65.81 73.62,66.32 71.08,66.32 70.57,66.83 C3X34.P$1
  Bottom 0.305: OK1X34.8 75.4,76.99 74.89,76.48 74.89,71.4
  Bottom 0.406: 74.89,71.4 73.83,70.13 C3X34.P$1
N$35X11
  Top 0.254: OK1X11.2 14.4,14.63 12.8,14.63 R1X11.2 11.89,15.32 7.77,15.32 5.26,12.8 C1X11.P$1 5.03,12.57 2.74,10.29 D1X11.C
N$35X12
  Top 0.254: OK1X12.2 14.4,34.62 12.8,34.62 R1X12.2 11.89,35.31 7.77,35.31 5.26,32.79 C1X12.P$1 5.03,32.56 2.74,30.28 D1X12.C
N$35X13
  Top 0.254: OK1X13.2 14.4,54.61 12.8,54.61 R1X13.2 11.89,55.3 7.77,55.3 5.26,52.78 C1X13.P$1 5.03,52.55 2.74,50.27 D1X13.C
N$35X14
  Top 0.254: OK1X14.2 14.4,74.6 12.8,74.6 R1X14.2 11.89,75.29 7.77,75.29 5.26,72.77 C1X14.P$1 5.03,72.54 2.74,70.26 D1X14.C
N$35X21
  Top 0.254: OK1X21.2 42.32,14.63 40.72,14.63 R1X21.2 39.81,15.32 35.69,15.32 33.18,12.8 C1X21.P$1 32.95,12.57 30.66,10.29 D1X21.C
N$35X22
  Top 0.254: OK1X22.2 42.32,34.62 40.72,34.62 R1X22.2 39.81,35.31 35.69,35.31 33.18,32.79 C1X22.P$1 32.95,32.56 30.66,30.28 D1X22.C
N$35X23
  Top 0.254: OK1X23.2 42.32,54.61 40.72,54.61 R1X23.2 39.81,55.3 35.69,55.3 33.18,52.78 C1X23.P$1 32.95,52.55 30.66,50.27 D1X23.C
N$35X24
  Top 0.254: OK1X24.2 42.32,74.6 40.72,74.6 R1X24.2 39.81,75.29 35.69,75.29 33.18,72.77 C1X24.P$1 32.95,72.54 30.66,70.26 D1X24.C
N$35X31
  Top 0.254: OK1X31.2 70.24,14.63 68.64,14.63 R1X31.2 67.73,15.32 63.61,15.32 61.1,12.8 C1X31.P$1 60.87,12.57 58.58,10.29 D1X31.C
N$35X32
  Top 0.254: OK1X32.2 70.24,34.62 68.64,34.62 R1X32.2 67.73,35.31 63.61,35.31 61.1,32.79 C1X32.P$1 60.87,32.56 58.58,30.28 D1X32.C
N$35X33
  Top 0.254: OK1X33.2 70.24,54.61 68.64,54.61 R1X33.2 67.73,55.3 63.61,55.3 61.1,52.78 C1X33.P$1 60.87,52.55 58.58,50.27 D1X33.C
N$35X34
  Top 0.254: OK1X34.2 70.24,74.6 68.64,74.6 R1X34.2 67.73,75.29 63.61,75.29 61.1,72.77 C1X34.P$1 60.87,72.54 58.58,70.26 D1X34.C
N$39X11
  Top 0.254: 10.29,12.12 10.29,12.57 C1X11.P$2 10.29,12.12 | 10.29,12.12 10.29,10.29 D1X11.A | 10.29,12.12 14.4,12.12 OK1X11.3
  Bottom 0.254: DCC2X11.1 2.74,14.17 8.69,14.17 10.06,12.8 C1X11.P$2
N$39X12
  Top 0.254: 10.29,32.11 10.29,32.56 C1X12.P$2 10.29,32.11 | 10.29,32.11 10.29,30.28 D1X12.A | 10.29,32.11 14.4,32.11 OK1X12.3
  Bottom 0.254: DCC2X12.1 2.74,34.16 8.69,34.16 10.06,32.79 C1X12.P$2
N$39X13
  Top 0.254: 10.29,52.1 10.29,52.55 C1X13.P$2 10.29,52.1 | 10.29,52.1 10.29,50.27 D1X13.A | 10.29,52.1 14.4,52.1 OK1X13.3
  Bottom 0.254: DCC2X13.1 2.74,54.15 8.69,54.15 10.06,52.78 C1X13.P$2
N$39X14
  Top 0.254: 10.29,72.09 10.29,72.54 C1X14.P$2 10.29,72.09 | 10.29,72.09 10.29,70.26 D1X14.A | 10.29,72.09 14.4,72.09 OK1X14.3
  Bottom 0.254: DCC2X14.1 2.74,74.14 8.69,74.14 10.06,72.77 C1X14.P$2
N$39X21
  Top 0.254: 38.21,12.12 38.21,12.57 C1X21.P$2 38.21,12.12 | 38.21,12.12 38.21,10.29 D1X21.A | 38.21,12.12 42.32,12.12 OK1X21.3
  Bottom 0.254: DCC2X21.1 30.66,14.17 36.61,14.17 37.98,12.8 C1X21.P$2
N$39X22
  Top 0.254: 38.21,32.11 38.21,32.56 C1X22.P$2 38.21,32.11 | 38.21,32.11 38.21,30.28 D1X22.A | 38.21,32.11 42.32,32.11 OK1X22.3
  Bottom 0.254: DCC2X22.1 30.66,34.16 36.61,34.16 37.98,32.79 C1X22.P$2
N$39X23
  Top 0.254: 38.21,52.1 38.21,52.55 C1X23.P$2 38.21,52.1 | 38.21,52.1 38.21,50.27 D1X23.A | 38.21,52.1 42.32,52.1 OK1X23.3
  Bottom 0.254: DCC2X23.1 30.66,54.15 36.61,54.15 37.98,52.78 C1X23.P$2
N$39X24
  Top 0.254: 38.21,72.09 38.21,72.54 C1X24.P$2 38.21,72.09 | 38.21,72.09 38.21,70.26 D1X24.A | 38.21,72.09 42.32,72.09 OK1X24.3
  Bottom 0.254: DCC2X24.1 30.66,74.14 36.61,74.14 37.98,72.77 C1X24.P$2
N$39X31
  Top 0.254: 66.13,12.12 66.13,12.57 C1X31.P$2 66.13,12.12 | 66.13,12.12 66.13,10.29 D1X31.A | 66.13,12.12 70.24,12.12 OK1X31.3
  Bottom 0.254: DCC2X31.1 58.58,14.17 64.53,14.17 65.9,12.8 C1X31.P$2
N$39X32
  Top 0.254: 66.13,32.11 66.13,32.56 C1X32.P$2 66.13,32.11 | 66.13,32.11 66.13,30.28 D1X32.A | 66.13,32.11 70.24,32.11 OK1X32.3
  Bottom 0.254: DCC2X32.1 58.58,34.16 64.53,34.16 65.9,32.79 C1X32.P$2
N$39X33
  Top 0.254: 66.13,52.1 66.13,52.55 C1X33.P$2 66.13,52.1 | 66.13,52.1 66.13,50.27 D1X33.A | 66.13,52.1 70.24,52.1 OK1X33.3
  Bottom 0.254: DCC2X33.1 58.58,54.15 64.53,54.15 65.9,52.78 C1X33.P$2
N$39X34
  Top 0.254: 66.13,72.09 66.13,72.54 C1X34.P$2 66.13,72.09 | 66.13,72.09 66.13,70.26 D1X34.A | 66.13,72.09 70.24,72.09 OK1X34.3
  Bottom 0.254: DCC2X34.1 58.58,74.14 64.53,74.14 65.9,72.77 C1X34.P$2

## Text on the board
bPlace: G_Bunza 2020 / Decoder_FrontEnd | G_Bunza 2020 / Decoder_FrontEnd | G_Bunza 2020 / Decoder_FrontEnd | G_Bunza 2020 / Decoder_FrontEnd | G_Bunza 2020 / Decoder_FrontEnd | G_Bunza 2020 / Decoder_FrontEnd | G_Bunza 2020 / Decoder_FrontEnd | G_Bunza 2020 / Decoder_FrontEnd | G_Bunza 2020 / Decoder_FrontEnd | G_Bunza 2020 / Decoder_FrontEnd | G_Bunza 2020 / Decoder_FrontEnd | G_Bunza 2020 / Decoder_FrontEnd
tNames: G_Bunza 2020 / Decoder_FrontEnd | G_Bunza 2020 / Decoder_FrontEnd | G_Bunza 2020 / Decoder_FrontEnd | +5V | +5V | +5V | GND | GND | GND | G_Bunza 2020 / Decoder_FrontEnd | G_Bunza 2020 / Decoder_FrontEnd | G_Bunza 2020 / Decoder_FrontEnd | +5V | +5V | +5V | GND | GND | GND | G_Bunza 2020 / Decoder_FrontEnd | G_Bunza 2020 / Decoder_FrontEnd | G_Bunza 2020 / Decoder_FrontEnd | +5V | +5V | +5V | GND | GND | GND | G_Bunza 2020 / Decoder_FrontEnd | G_Bunza 2020 / Decoder_FrontEnd | G_Bunza 2020 / Decoder_FrontEnd | +5V | +5V | +5V | GND | GND | GND
Milling: V-Score | V-Score | V-Score | V-Score | V-Score
_tNames: OK1 | OK1 | OK1 | OK1 | OK1 | OK1 | OK1 | OK1 | OK1 | DCC1 | DCC1 | DCC1 | DCC1 | DCC1 | DCC1 | DCC1 | DCC1 | DCC1 | R1 | R1 | R1 | R1 | R1 | R1 | R1 | R1 | R1 | DCC2 | DCC2 | DCC2 | DCC2 | DCC2 | DCC2 | DCC2 | DCC2 | DCC2 | C1 | C1 | C1 | C1 | C1 | C1 | C1 | C1 | C1 | D1 | D1 | D1 | D1 | D1 | D1 | D1 | D1 | D1 | DCC | DCC | DCC | DCC | DCC | DCC | DCC | DCC | DCC | C3 | C3 | C3 | R3 | R3 | R3 | .. | .. | .. | C3 | C3 | C3 | R3 | R3 | R3 | .. | .. | .. | C3 | C3 | C3 | R3 | R3 | R3 | .. | .. | .. | R2 | R2 | R2 | . | . | . | R2 | R2 | R2 | . | . | . | R2 | R2 | R2 | . | . | . | C2 | C2 | C2 | C2 | C2 | C2 | OK1 | OK1 | OK1 | OK1 | OK1 | OK1 | OK1 | OK1 | OK1 | DCC1 | DCC1 | DCC1 | DCC1 | DCC1 | DCC1 | DCC1 | DCC1 | DCC1 | R1 | R1 | R1 | R1 | R1 | R1 | R1 | R1 | R1 | DCC2 | DCC2 | DCC2 | DCC2 | DCC2 | DCC2 | DCC2 | DCC2 | DCC2 | C1 | C1 | C1 | C1 | C1 | C1 | C1 | C1 | C1 | D1 | D1 | D1 | D1 | D1 | D1 | D1 | D1 | D1 | DCC | DCC | DCC | DCC | DCC | DCC | DCC | DCC | DCC | C3 | C3 | C3 | R3 | R3 | R3 | .. | .. | .. | C3 | C3 | C3 | R3 | R3 | R3 | .. | .. | .. | C3 | C3 | C3 | R3 | R3 | R3 | .. | .. | .. | R2 | R2 | R2 | . | . | . | R2 | R2 | R2 | . | . | . | R2 | R2 | R2 | . | . | . | C2 | C2 | C2 | C2 | C2 | C2 | OK1 | OK1 | OK1 | OK1 | OK1 | OK1 | OK1 | OK1 | OK1 | DCC1 | DCC1 | DCC1 | DCC1 | DCC1 | DCC1 | DCC1 | DCC1 | DCC1 | R1 | R1 | R1 | R1 | R1 | R1 | R1 | R1 | R1 | DCC2 | DCC2 | DCC2 | DCC2 | DCC2 | DCC2 | DCC2 | DCC2 | DCC2 | C1 | C1 | C1 | C1 | C1 | C1 | C1 | C1 | C1 | D1 | D1 | D1 | D1 | D1 | D1 | D1 | D1 | D1 | DCC | DCC | DCC | DCC | DCC | DCC | DCC | DCC | DCC | C3 | C3 | C3 | R3 | R3 | R3 | .. | .. | .. | C3 | C3 | C3 | R3 | R3 | R3 | .. | .. | .. | C3 | C3 | C3 | R3 | R3 | R3 | .. | .. | .. | R2 | R2 | R2 | . | . | . | R2 | R2 | R2 | . | . | . | R2 | R2 | R2 | . | . | . | C2 | C2 | C2 | C2 | C2 | C2 | OK1 | OK1 | OK1 | OK1 | OK1 | OK1 | OK1 | OK1 | OK1 | DCC1 | DCC1 | DCC1 | DCC1 | DCC1 | DCC1 | DCC1 | DCC1 | DCC1 | R1 | R1 | R1 | R1 | R1 | R1 | R1 | R1 | R1 | DCC2 | DCC2 | DCC2 | DCC2 | DCC2 | DCC2 | DCC2 | DCC2 | DCC2 | C1 | C1 | C1 | C1 | C1 | C1 | C1 | C1 | C1 | D1 | D1 | D1 | D1 | D1 | D1 | D1 | D1 | D1 | DCC | DCC | DCC | DCC | DCC | DCC | DCC | DCC | DCC | C3 | C3 | C3 | R3 | R3 | R3 | .. | .. | .. | C3 | C3 | C3 | R3 | R3 | R3 | .. | .. | .. | C3 | C3 | C3 | R3 | R3 | R3 | .. | .. | .. | R2 | R2 | R2 | . | . | . | R2 | R2 | R2 | . | . | . | R2 | R2 | R2 | . | . | . | C2 | C2 | C2 | C2 | C2 | C2